# EAGLE board AAA_third_source_with charger (EAGLE 7.2.0)
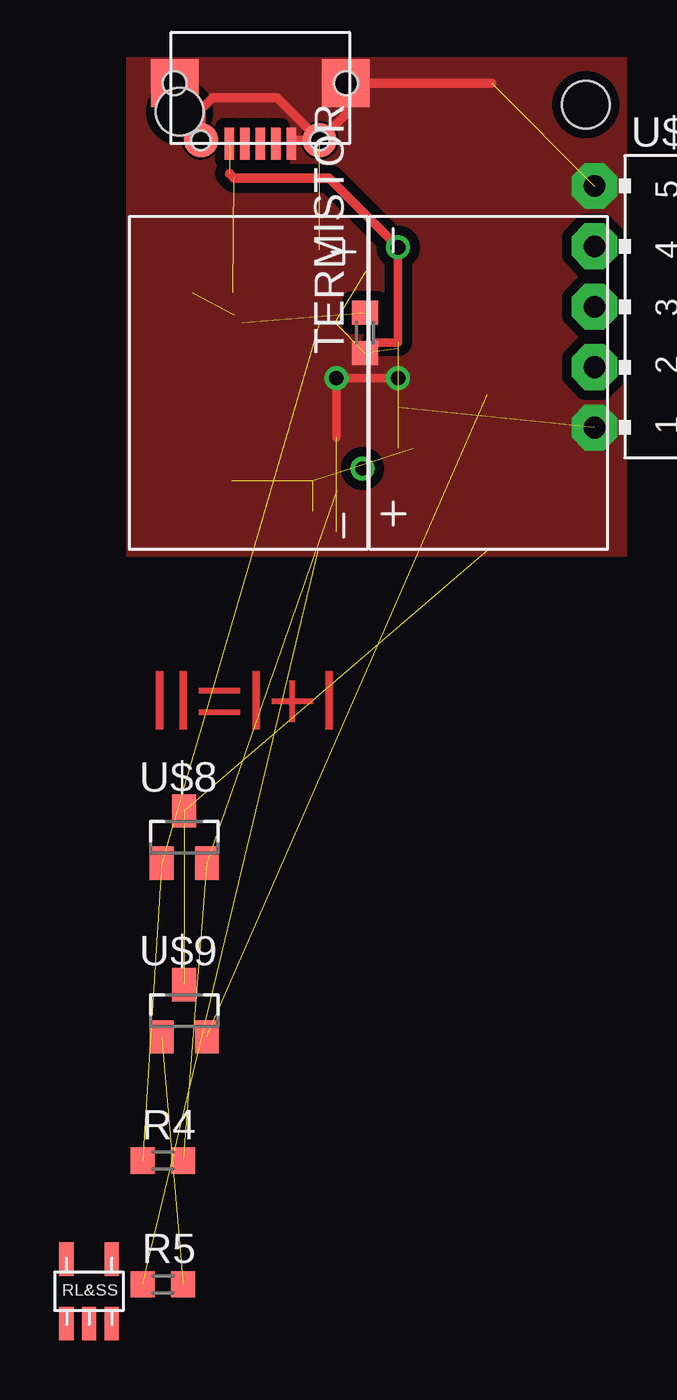
[diagram p0: board, top side]
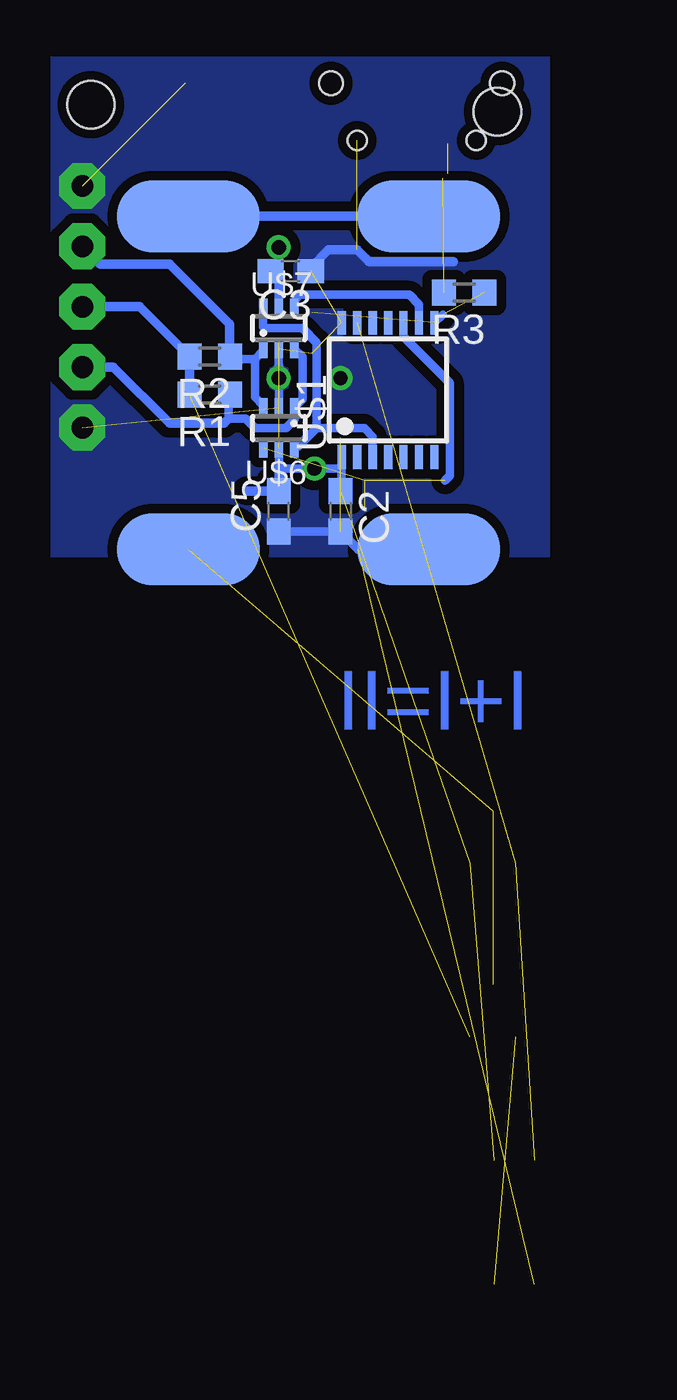
[diagram p1: board, bottom side, seen from below]

No outline drawn. Coordinates in mm, seen from the top.
Copper layers (1*16): Top 0.035mm / dielectric 1.5mm / Bottom 0.035mm
Design rules "default *": minimum track width 10mil, minimum drill 24mil, track to track 8mil, track to pad 8mil, pad to pad 8mil, via to via 8mil, smd to smd 8mil, copper to edge 0mil, drill to drill 8mil, minimum pad ring 10mil, minimum via ring 8mil, stop-mask expansion 4mil, vias tented up to drill 0mil, thermal gap 10mil
Holes 2 mm at 2.2,18.7 19.3,19

## Footprints (pad centres in the part's own frame; a part is rotated, then mirrored left to right if it is on the bottom)
C0603 = smd 1.1 x 1: 1 -0.85,0; 2 0.85,0
R0603 = smd 1 x 1.1: 1 -0.85,0; 2 0.85,0
TSSOP14 = smd 0.35 x 1: 1 -1.95,-2.825; 2 -1.3,-2.825; 3 -0.65,-2.825; 4 0,-2.825; 5 0.65,-2.825; 6 1.3,-2.825; 7 1.95,-2.825; 8 1.95,2.825; 9 1.3,2.825; 10 0.65,2.825; 11 0,2.825; 12 -0.65,2.825; 13 -1.3,2.825; 14 -1.95,2.825
AAA_THIRD = smd 3 x 6 bottom: P$1 -7,0; P$2 7,0
MICROUSB-MOLEX = smd 0.4 x 1.35: D+ 0,2.35; D- 0.65,2.35; GND -1.3,2.35; NC -0.65,2.35; VUSB 1.3,2.35 | smd 2 x 2: P$1 -3.6,-0.2; P$2 3.6,-0.2 | smd 1.45 x 1.45: P$3 -2.5,2.2; P$4 2.5,2.2 | hole 0.8: -2.5,2.2; 2.5,2.2 | hole 1: -3.6,-0.2; 3.6,-0.2
JUMPER5F-90 = drill 0.914 pad 1.93 octagon: 1 5.08,-2.54; 2 2.54,-2.54; 3 0,-2.54; 4 -2.54,-2.54; 5 -5.08,-2.54
SC70-6L = smd 0.35 x 0.8: 1 -0.65,-0.85; 2 0,-0.85; 3 0.65,-0.85; 4 0.65,0.85; 5 0,0.85; 6 -0.65,0.85
SOT23 = smd 1 x 1.4: D 0,1.1; G -0.95,-1.1; S 0.95,-1.1
SOT32-5 = smd 0.6 x 1.4: BP 0.95,1.35; GND 0,-1.35; SHDN 0.95,-1.35; VIN -0.95,-1.35; VOUT -0.95,1.35

## Placement (x,y rotation side)
C2  100nF  [C0603]  8.8,1.9 270 bottom
C3  100nF  [C0603]  10.9,12 180 bottom
C5  100nF  [C0603]  11.4,1.9 90 bottom
R1  2k2  [R0603]  14.3,6.8 180 bottom
R2  2k2  [R0603]  14.3,8.4 180 bottom
R3  10k  [R0603]  3.6,11.1 180 bottom
R4  10k  [R0603]  1.5,-25.4 0 top
R5  10k  [R0603]  1.5,-30.6 0 top
TERMISTOR  10k  [R0603]  10,9.4 90 top
U$1  16F103-TSSOP  [TSSOP14]  6.8,7 0 bottom
U$2  AAA_THIRD  [AAA_THIRD]  15.2,7.3 90 top
U$3  AAA_THIRD  [AAA_THIRD]  5.1,7.3 270 top
U$4  USBMICRO  [MICROUSB-MOLEX]  5.6,19.7 180 top
U$5  JUMPER5F-90  [JUMPER5F-90]  22.2,10.5 270 top
U$6  NC7SB3157P6X  [SC70-6L]  11.4,5.4 180 bottom
U$7  NC7SB3157P6X  [SC70-6L]  11.4,9.6 0 bottom
U$8  P-MOSFET-FDV304P  [SOT23]  2.4,-11.8 0 top
U$9  P-MOSFET-FDV304P  [SOT23]  2.4,-19.1 0 top
U$10  STABILISER_APE8865  [SOT32-5]  -1.6,-30.9 0 top

## Library data of the parts
C2 C3 C5 R1-R5 TERMISTOR = resistor
U$1-U$10 = !stavebnice03

## Nets
GND: C2.2 C3.1 C5.1 R5.1 TERMISTOR.1 U$1.14 U$4.GND U$4.P$1 U$4.P$2 U$4.P$3 U$4.P$4 U$5.1 U$5.5 U$6.2 U$7.2
N$1: U$1.3 U$6.6 U$7.6
N$2: U$2.P$2 U$3.P$1
N$3: R3.1 TERMISTOR.2 U$1.8
N$4: U$1.9 U$7.4
N$5: R1.2 R2.2 U$5.3 U$9.S
N$6: R1.1 U$5.2 U$6.1 U$7.3
N$7: U$1.10 U$6.4
N$8: U$2.P$1 U$8.D U$9.D
N$9: R4.1 U$1.13 U$8.G
N$10: R2.1 U$5.4 U$6.3 U$7.1
N$11: U$3.P$2
N$12: R5.2 U$9.G
VCC: C2.1 C3.2 C5.2 R3.2 R4.2 U$1.1 U$4.VUSB U$6.5 U$7.5 U$8.S

## Tracks (layer width: path | path; a pad name or v marks a point on that pad's centre or on a via)
GND  (via drill 0.6)  (8 unrouted)
  Top 0.357: v11.4,7.5 v8.8,7.5 | 8.8,5 v8.8,7.5 | v8.8,7.5 8.7,7.7
  Top 0.406: 15.34,19.9 U$4.P$1 9.2,18.6 U$4.P$3 | U$4.P$3 7.05,17.5 U$4.GND | 3.1,18.8 U$4.P$2 | U$4.P$4 3.1,18.8 | 3.1,18.8 3.6,19.3 6.3,19.3 U$4.P$3
  Bottom 0.356: C2.2 C5.1
  Bottom 0.357: v11.4,7.5 11.39,6.61 U$7.2 11.39,7.51 v11.4,7.5 | U$6.2 11.39,6.59 v11.4,7.5 | 8.7,7.7 v8.8,7.5
  Bottom 0.406: 8.05,0.3 C2.2 | C3.1 10.05,12.15 9.3,12.9 8.1,12.9 7.6,12.4 4.05,12.4
  pour Bottom (isolate 0.406, rank 2, no thermals): 0,0 0,21 21,21 21,0
  pour Top (isolate 0.406, no thermals): 0,0 0,21 21,21 21,0
N$1
  Bottom 0.356: U$1.3 7.45,5.05 7.8,5.4 | U$7.6 12.05,9.65 12.04,9.64
  Bottom 0.357: 12.04,9.64 12,9.6 10.4,9.6 9.8,9 9.8,5.4 | 7.8,5.4 9.8,5.4 | 9.8,5.4 10.6,4.6 10.7,4.6 U$6.6
N$2
  Bottom 0.406: U$3.P$1 U$2.P$2
N$3  (2 unrouted)
  Bottom 0.356: 4.5,10.18 U$1.8
N$4
  Bottom 0.356: U$1.9 5.5,10.6 5.9,11
  Bottom 0.357: 5.9,11 10.5,11 10.74,10.76 U$7.4
N$5  (1 unrouted)
  Bottom 0.406: U$5.3 17.25,10.5 R2.2 R1.2
N$6
  Bottom 0.356: 13.45,6.65 R1.1 13.5,6.75 13.5,5.8 12.8,5.8 12.4,5.4
  Bottom 0.357: U$7.3 10.4,8.4 10.4,6.59 U$6.1 10.74,5.76 11.1,5.4 12.4,5.4 12.41,5.4
  Bottom 0.406: U$5.2 18.36,7.96 16,5.6 13.7,5.6 13.5,5.8
N$7  (3 unrouted)
  Bottom 0.356: U$1.10 6.15,9.25 4.2,7.3
  Bottom 0.357: 4.2,7.3 4.2,3.4 4.4,3.2
N$8  (2 unrouted)
N$9  (2 unrouted)
N$10
  Bottom 0.356: 13.14,8.71 R2.1 | R2.1 13.48,8.58 | U$6.3 12.05,6.35 12.4,6.7 12.4,8.3 | U$7.1 12.05,8.65 12.4,8.3 | 12.4,8.3 13.35,8.3 R2.1
  Bottom 0.406: 13.48,8.58 13.48,9.78 16,12.3 18.92,12.3 U$5.4
N$12  (1 unrouted)
VCC  (via drill 0.6)  (5 unrouted)
  Top 0.356: 11.4,9 10.45,9
  Top 0.357: v11.4,13 11.4,9
  Top 0.406: 4.3,16.1 4.5,15.9 8.5,15.9 v11.4,13
  Bottom 0.356: U$1.1 8.75,3.6 | 8.75,3.6 8.75,3 C2.1 | v9.9,3.7 8.85,3.7 8.75,3.6
  Bottom 0.357: 11.31,3.5 C5.2 11.4,3.7 | 8.72,3.05 C2.1 8.72,3.21 | 11.4,3.7 11.39,3.91 U$6.5 11.39,3.81 11.4,3.8 11.4,3.7 | 11.45,11.7 C3.2 11.39,11.63 U$7.5 11.39,12.91 v11.4,13 | 11.4,3.7 v9.9,3.7
  Bottom 0.406: C5.2 12.75,2.75

## Text on the board
Top: II=I+I
Bottom: II=I+I
Dimension: AAA source